# Altium PCB AirPi2_Power.PcbDoc
Units mm, origin at the board's own origin, x right, y up, seen from the top; angles counter-clockwise.
Board outline 80.9 x 56.52 mm, 2 copper layers (Top Layer, Bottom Layer); 40 components, 26 nets, 163 pads, 22 vias.
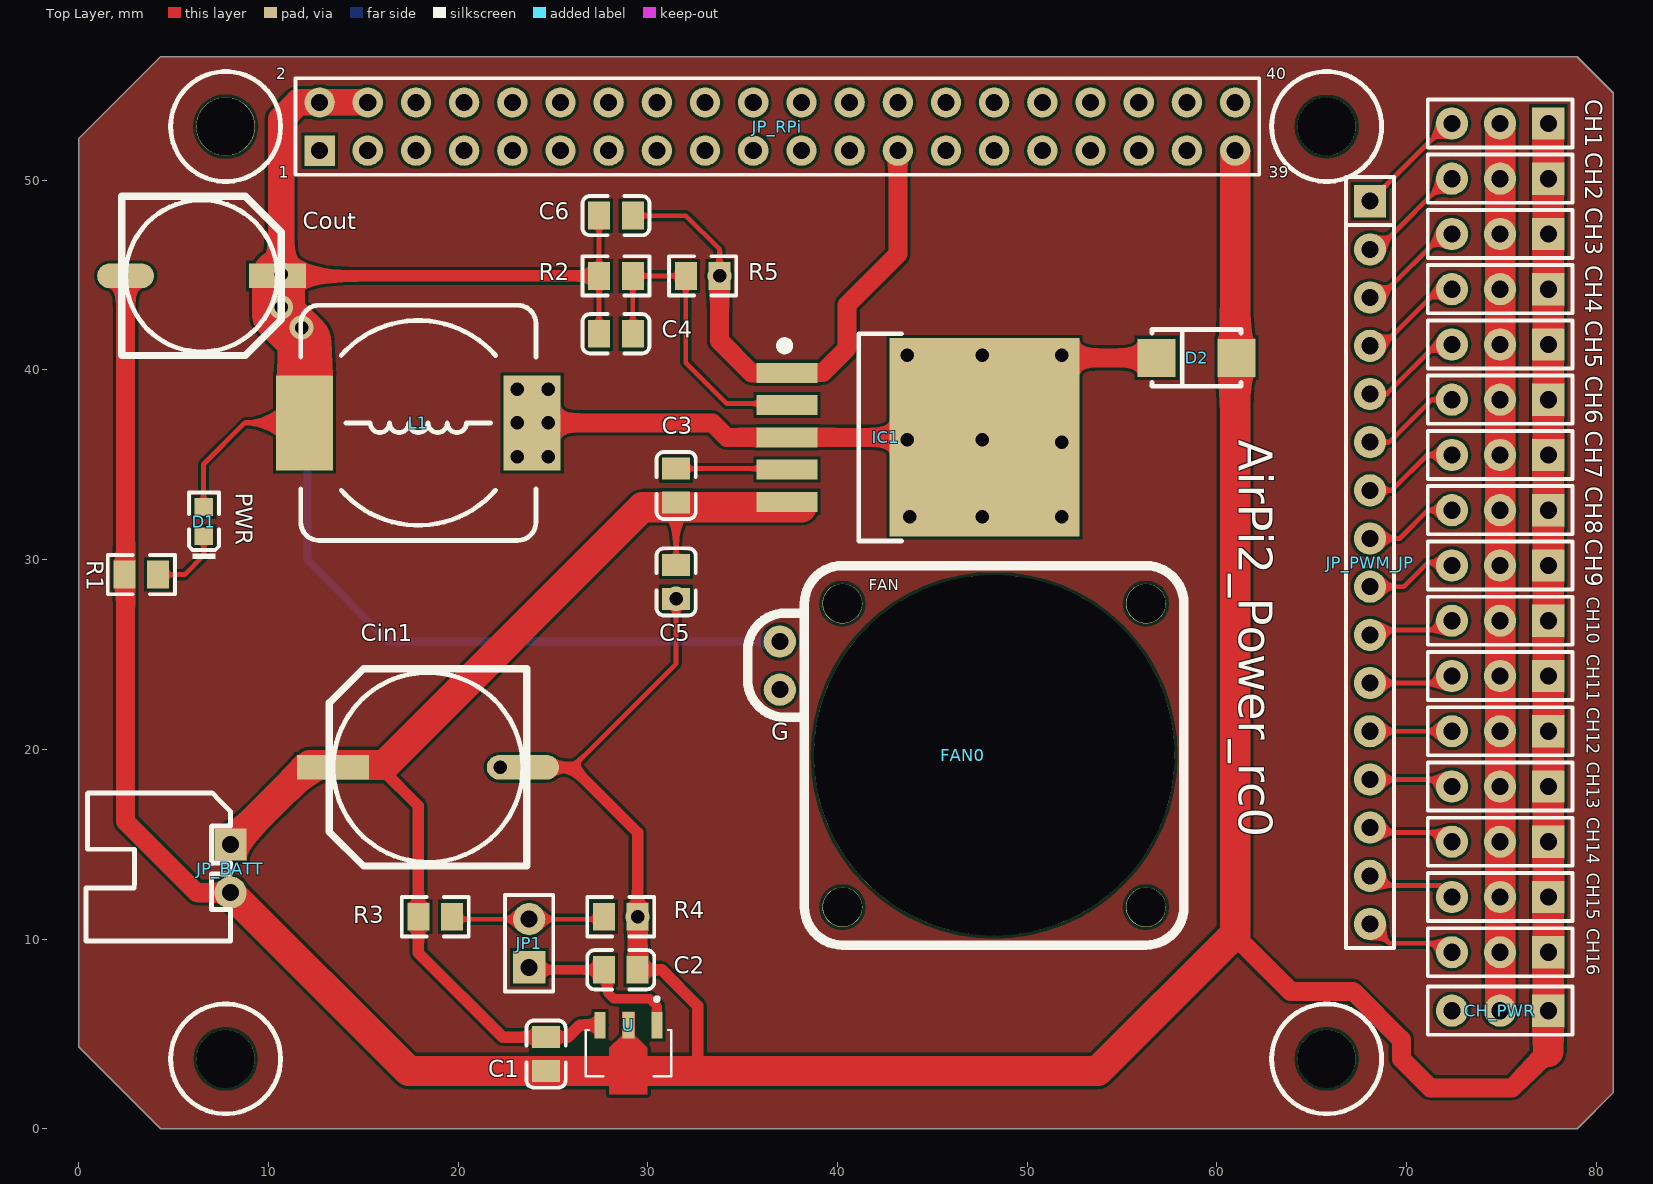
[diagram p0: Top Layer view]
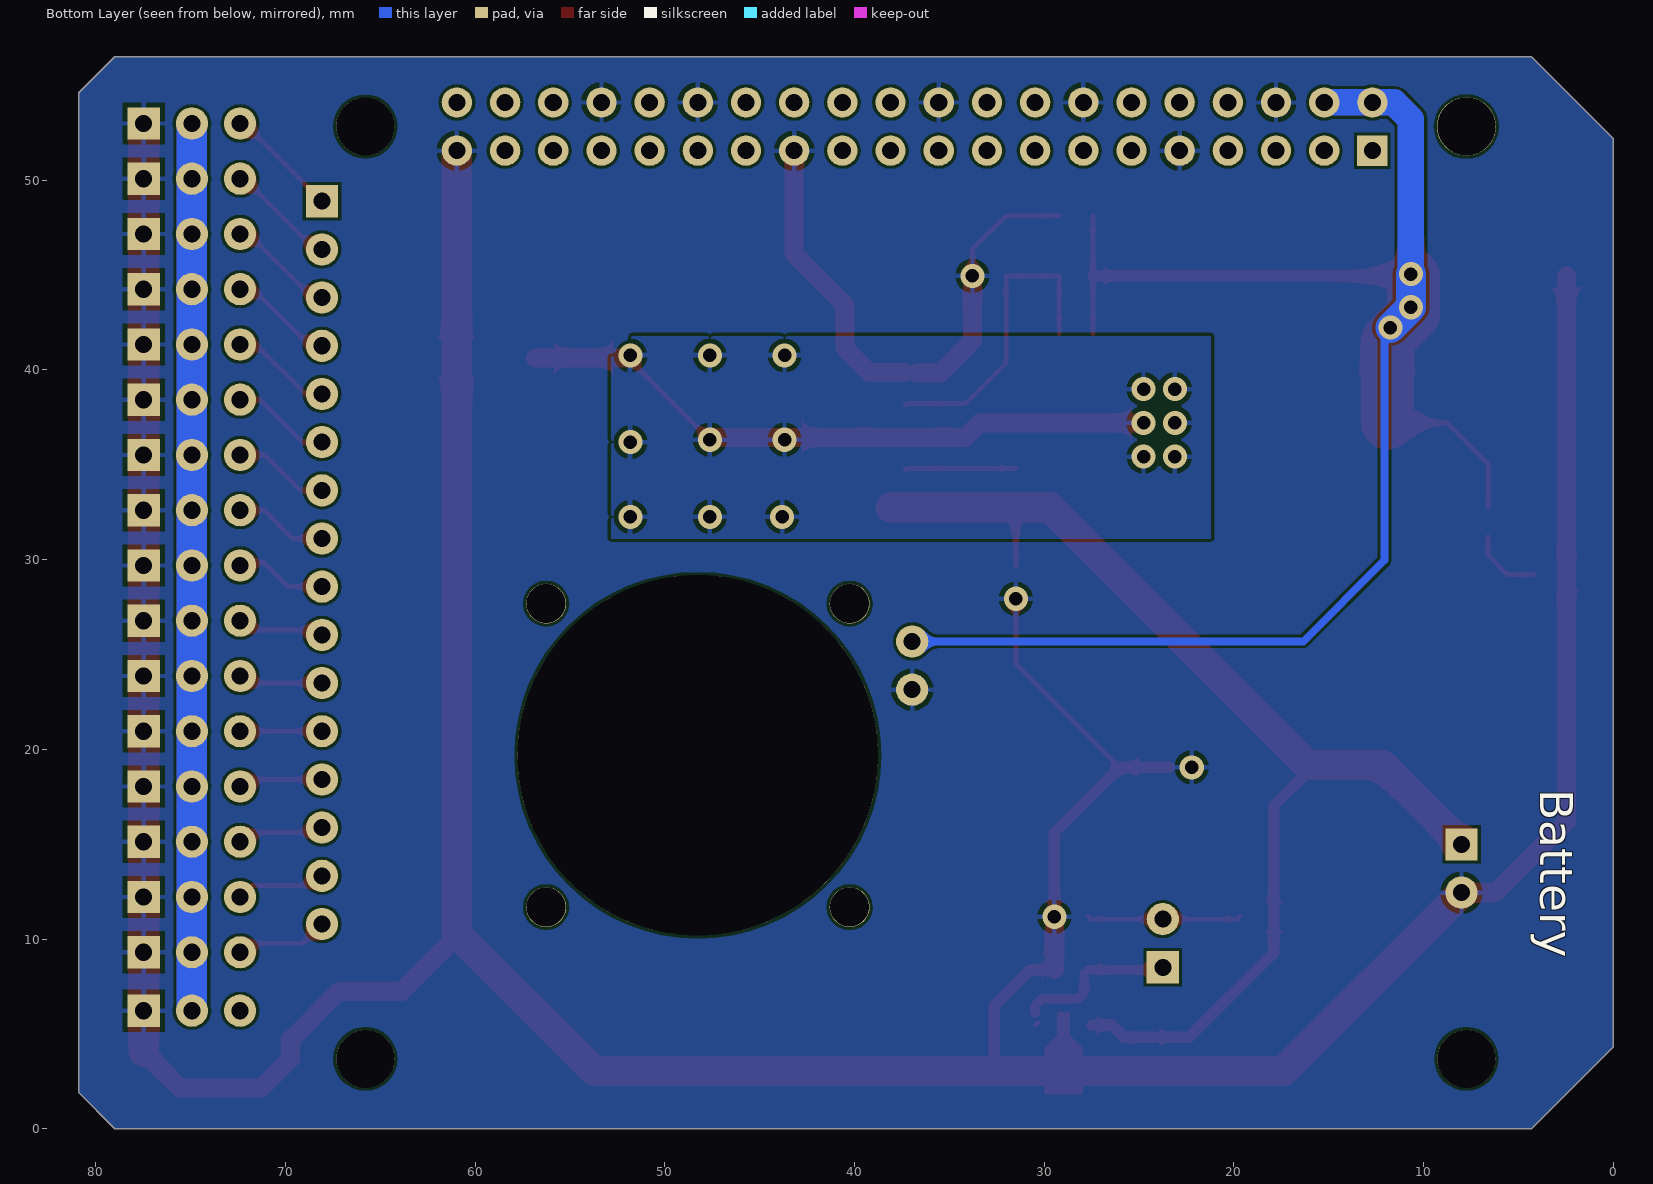
[diagram p1: Bottom Layer view, seen from below]

## Layer stack, top to bottom
Top Solder: solder mask 0.0102, Solder Resist, Dk 3.5
Top Layer: signal copper 0.0356
Dielectric 1: dielectric 0.32, FR-4, Dk 4.8
Bottom Layer: signal copper 0.0356
Bottom Solder: solder mask 0.0102, Solder Resist, Dk 3.5

## Board outline
0,52.197 4.318,56.515 78.994,56.515 80.899,54.61 80.899,1.905 78.994,0 4.318,0 0,4.318

## Design rules (kind name [scope] priority, off if disabled: settings)
Clearance [All] p1: gap=0.152 ignorepadtopadclearanceinfootprint=TRUE except(0: Arc-Hole Track-Hole SMDPad-Hole THPad-Hole Via-Hole Fill-Hole Poly-Hole Region-Hole Text-Hole)
DiffPairsRouting [All] p1: maxlimit=30 minlimit=0.152 mostfreqgap=0.254 toplayer_minwidth=0.152 toplayer_maxwidth=30 toplayer_prefwidth=0.254 bottomlayer_minwidth=0.152 bottomlayer_maxwidth=30 bottomlayer_prefwidth=0.254 maxuncoupledlength=12.7
PlaneConnect [All] p1: planeconnectstyle=Relief reliefexpansion=0.508 reliefentries=4 reliefconductorwidth=0.508 reliefairgap=0.254
PolygonConnect [All] p1: connectstyle=Relief reliefconductorwidth=0.254 reliefentries=4 polygonreliefangle="90 Angle" airgapwidth=0.254
RoutingTopology [All] p1: topology=Daisy_Simple
RoutingVias [All] p1: holewidth=0.711 width=1.27 viastyle="Through Hole" minholewidth=0.3 minwidth=0.6 maxholewidth=50 maxwidth=100
SolderMaskExpansion [All] p1: expansion=0.102
UnRoutedNet [All] p1: checkbadconnections=TRUE
Width [All] p1: maxlimit=30 minlimit=0.152 preferedwidth=0.254
26 further rules are at their usual default settings.

## Classes and differential pairs
net class PWM[15..0]: PWM0 PWM1 PWM2 PWM3 PWM4 PWM5 PWM6 PWM7 PWM8 PWM9 PWM10 PWM11 PWM12 PWM13 PWM14 PWM15
component class XL4015: C3 C4 C5 C6 Cin1 Cout D2 IC1 L1 R2 R5
component class Voltage_Divider: R3 R4
component class FAN: FAN0
component class AirPi2_Power: CH1 CH2 CH3 CH4 CH5 CH6 CH7 CH8 CH9 CH10 CH11 CH12 CH13 CH14 CH15 CH16 CH_PWR D1 JP1 JP_BATT JP_PWM_JP JP_RPi R1
component class 78l06: C1 C2 U

## Components (designator, comment, footprint, x,y, rotation, side; value= is the part's Value field where it differs from the comment)
C1 "330nF (334) 10% 50V" 0805_C 24.638,3.937 r90 top
C2 "100nF(104) 10% 50V" 0805_C 28.575,8.382 r180 top
C3 "1uF (105) 10% 50V" 0805_C 31.496,33.909 r270 top
C4 "33nF (333) 10% 50V" 0805_C 28.322,41.91 r180 top
C5 "1uF (105) 10% 50V" 0805_C 31.496,28.829 r90 top
C6 "1uF (105) 10% 50V" 0805_C 28.322,48.133 r180 top
CH1 "HDR-1X3" HDR2.54-LI-3P 74.93,52.993 r180 top
CH2 "HDR-1X3" HDR2.54-LI-3P 74.93,50.08 r180 top
CH3 "HDR-1X3" HDR2.54-LI-3P 74.93,47.168 r180 top
CH4 "HDR-1X3" HDR2.54-LI-3P 74.93,44.255 r180 top
CH5 "HDR-1X3" HDR2.54-LI-3P 74.93,41.343 r180 top
CH6 "HDR-1X3" HDR2.54-LI-3P 74.93,38.43 r180 top
CH7 "HDR-1X3" HDR2.54-LI-3P 74.93,35.518 r180 top
CH8 "HDR-1X3" HDR2.54-LI-3P 74.93,32.605 r180 top
CH9 "HDR-1X3" HDR2.54-LI-3P 74.93,29.693 r180 top
CH10 "HDR-1X3" HDR2.54-LI-3P 74.93,26.78 r180 top
CH11 "HDR-1X3" HDR2.54-LI-3P 74.93,23.868 r180 top
CH12 "HDR-1X3" HDR2.54-LI-3P 74.93,20.955 r180 top
CH13 "HDR-1X3" HDR2.54-LI-3P 74.93,18.042 r180 top
CH14 "HDR-1X3" HDR2.54-LI-3P 74.93,15.13 r180 top locked
CH15 "HDR-1X3" HDR2.54-LI-3P 74.93,12.217 r180 top
CH16 "HDR-1X3" HDR2.54-LI-3P 74.93,9.305 r180 top
CH_PWR "HDR-1X3" HDR2.54-LI-3P 74.93,6.223 r180 top
Cin1 "220uF/50V" "CM F(10*10.2)" 18.415,19.05 r180 top locked
Cout "470uF/16V" "CM E(8*10.2)" 6.477,44.958 r0 top locked
D1 "红灯 0603" 0603_LED_S1 6.604,32.004 r90 top
D2 "SS54" SMA(DO-214AC)_S1 58.928,40.64 r0 top
FAN0 "20mm_5V_风扇" 20mmFAN 40.26,11.685 r0 top locked
IC1 "XL4015" TO263-5A 37.338,36.449 r270 top locked
JP1 "HDR-1X2" HDR2.54-M-LI-2P 23.749,9.779 r90 top locked
JP_BATT "HDR-1X2" XH2.54-WI-2P 8.001,13.716 r270 top locked
JP_PWM_JP "HDR-1X16" HDR2.54-M-LI-16P 68.072,29.845 r270 top locked
JP_RPi "Header 2X11" HDR2.54-LI-2x20P 36.83,52.832 r0 top locked
L1 "47uH" CDRH127 17.907,37.211 r180 top locked
R1 "1KΩ (1001) ±1%" 0805_R 3.302,29.21 r0 top
R2 "10KΩ (1002) ±1%" 0805_R 28.322,44.958 r180 top
R3 "4.7KΩ (4701) ±1%" 0805_R 18.796,11.176 r180 top
R4 "1KΩ (1001) ±1%" 0805_R 28.575,11.176 r180 top
R5 "3.3KΩ (3301) ±1%" 0805_R 32.894,44.958 r180 top
U "L78L06ACUTR" VREG_L78L12ABUTR 28.98,3.986 r270 top

## Footprints (in the part's own frame and the unit in brackets; to place one, negate y for a bottom-side part, rotate by r counter-clockwise, add the part's x,y. Pads: shape width x height; smd on the part's side, far side on the other; paste and mask are expansions set on the pad)
20mmFAN [mm] "20mm_5V_风扇"
  round 1.7 hole 0.9: 6(-3.3,11.46) 7(-3.3,14)
  round 2.1 hole 2.05: 8(0,0) 9(0,16) 10(16,16) 11(16,0)
  round 19 hole 19: 12(8,8)
  silkscreen extent -5,-2 18,18
0603_LED_S1 [mm]
  rect 0.93x0.98 smd: A(0.77,0) K(-0.77,0)
  silkscreen extent -1.97,-0.79 1.54,0.79, body extent -0.8,-0.4 0.8,0.4, height 0.6
0805_C [mm]
  rect 1.16x1.47 smd: 1(-0.89,0) 2(0.89,0)
  silkscreen extent -1.77,-1.04 1.77,1.04, body extent -1,-0.62 1,0.63, height 0.77
0805_R [mm]
  rect 1.16x1.47 smd: 1(-0.89,0) 2(0.89,0)
  silkscreen extent -1.77,-1.04 1.77,1.03, body extent -1,-0.62 1,0.63, height 0.49
CDRH127 [mm] "12*12*8mm（长宽高）"
  rect 3x5 smd: 1(-6,0) 2(6,0)
  silkscreen extent -6.2,-6.2 6.2,6.2, body extent -6,-6 6,6, height 7.8
"CM E(8*10.2)" [mm] "贴片电解电容，直径8mm，高10.2mm"
  rect 3x1.3 smd: 1(4,0)
  oval 3x1.3 smd: 2(-4,0)
  silkscreen extent -4.2,-4.2 4.2,4.2, body extent -4.5,-4.15 4.5,4.15, height 10.2
"CM F(10*10.2)" [mm] "贴片电解电容，直径10mm，高10.2mm"
  rect 3.8x1.3 smd: 1(5,0)
  oval 3.8x1.3 smd: 2(-5,0)
  silkscreen extent -5.2,-5.2 5.2,5.2, body extent -5.8,-5.15 5.8,5.15, height 10.2
HDR2.54-LI-2x20P [mm] "双排排针，20x2脚"
  rect 1.6x1.6 hole 0.9: 1(-24.13,-1.27)
  round 1.6 hole 0.9: 2(-24.13,1.27) 3(-21.59,-1.27) 4(-21.59,1.27) 5(-19.05,-1.27) 6(-19.05,1.27) 7(-16.51,-1.27) 8(-16.51,1.27) 9(-13.97,-1.27) 10(-13.97,1.27) 11(-11.43,-1.27) 12(-11.43,1.27) 13(-8.89,-1.27) 14(-8.89,1.27) 15(-6.35,-1.27) 16(-6.35,1.27) 17(-3.81,-1.27) 18(-3.81,1.27) 19(-1.27,-1.27) 20(-1.27,1.27) 21(1.27,-1.27) 22(1.27,1.27) 23(3.81,-1.27) 24(3.81,1.27) 25(6.35,-1.27) 26(6.35,1.27) 27(8.89,-1.27) 28(8.89,1.27) 29(11.43,-1.27) 30(11.43,1.27) 31(13.97,-1.27) 32(13.97,1.27) 33(16.51,-1.27) 34(16.51,1.27) 35(19.05,-1.27) 36(19.05,1.27) 37(21.59,-1.27) 38(21.59,1.27) 39(24.13,-1.27) 40(24.13,1.27)
  silkscreen extent -25.4,-2.54 25.4,2.54, body extent -25.4,-2.54 25.4,2.54, height 8.5
HDR2.54-LI-3P [mm] "排针，3脚"
  rect 1.7x1.7 hole 0.9: 1(-2.54,0)
  round 1.7 hole 0.9: 2(0,0) 3(2.54,0)
  silkscreen extent -3.81,-1.27 3.81,1.27, body extent -3.81,-1.27 3.81,1.27, height 8.5
HDR2.54-M-LI-2P [mm] "排母，2脚"
  rect 1.7x1.7 hole 0.9: 1(-1.27,0)
  round 1.7 hole 0.9: 2(1.27,0)
  silkscreen extent -2.54,-1.27 2.54,1.27, body extent -2.54,-1.27 2.54,1.27, height 8.5
HDR2.54-M-LI-16P [mm] "排母，16脚"
  rect 1.7x1.7 hole 0.9: 1(-19.05,0)
  round 1.7 hole 0.9: 2(-16.51,0) 3(-13.97,0) 4(-11.43,0) 5(-8.89,0) 6(-6.35,0) 7(-3.81,0) 8(-1.27,0) 9(1.27,0) 10(3.81,0) 11(6.35,0) 12(8.89,0) 13(11.43,0) 14(13.97,0) 15(16.51,0) 16(19.05,0)
  silkscreen extent -20.32,-1.27 20.32,1.27, body extent -20.32,-1.27 20.32,1.27, height 8.5
SMA(DO-214AC)_S1 [mm]
  rect 2x2 smd: 1(2.1,0) 2(-2.1,0)
  silkscreen extent -2.35,-1.5 2.35,1.5
TO263-5A [mm] "263，5脚晶体管"
  rect 1.05x3.2 smd: 1(-3.4,0) 2(-1.7,0) 3(0,0) 4(1.7,0) 5(3.4,0)
  rect 10.45x10 smd: 3(0,10.414)
  silkscreen extent -5.46,-0.33 5.46,6.04, body extent -5,-0.01 5,13.32, height 4.5
VREG_L78L12ABUTR [mm]
  rect 1.4x0.57 smd: 1(-1.475,1.5) 3(-1.475,-1.5)
  rect 1.4x0.65 smd paste-2 mask+0: 2(-1.475,0)
  Top Layer region: 2.175,-1 -0.275,-1 -0.95,-0.325 -2.175,-0.325 -2.175,0.325 -0.95,0.325 -0.275,1 2.175,1
  silkscreen extent -2.95,-2.25 1.22,2.25
XH2.54-WI-2P [mm] "接插件，2P"
  rect 1.7x1.7 hole 0.9: 1(-1.27,0)
  round 1.7 hole 0.9: 2(1.27,0)
  silkscreen extent -3.99,-7.62 3.81,0, body extent -3.77,-7.35 3.77,0.35, height 5.73

## Part data
C1: library part "0805 330nF (334) 10% 50V", "贴片电容", Package=0805, SuppliersPartNumber=C1740, ComponentLink1Description=¹©Ó, ComponentLink1URL=http://www.szlcsc.com/product/details_2092.html, Supplier=LC
C2: library part "0805 100nF(104) 10% 50V", "贴片电容", Package=0805, SuppliersPartNumber=C49678, ComponentLink1Description=¹©Ó, ComponentLink1URL=http://www.szlcsc.com/product/details_50686.html, Supplier=LC
C3 C5 C6: library part "0805 1uF (105) 10% 50V", "贴片电容", Package=0805, SuppliersPartNumber=C28323, ComponentLink1Description=¹©Ó, ComponentLink1URL=http://www.szlcsc.com/product/details_29074.html, Supplier=LC
C4: library part "0805 33nF (333) 10% 50V", "贴片电容", Package=0805, SuppliersPartNumber=C1739, ComponentLink1Description=¹©Ó, ComponentLink1URL=http://www.szlcsc.com/product/details_2091.html, Supplier=LC
CH1 CH2 CH3 CH4 CH5 CH6 CH7 CH8 CH9 CH10 CH11 CH12 CH13 CH14 CH15 CH16 CH_PWR: library part "Header 3", "3P接插件", BOM名称=3, 学习资源=www.o
Cin1 Cout: library part C-CM, "贴片电解电容"
D1: library part "0603 红灯", "发光二极管", Package=0603, SuppliersPartNumber=C2286, ComponentLink1Description=¹©Ó, ComponentLink1URL=http://www.szlcsc.com/product/details_2659.html, Supplier=LC
D2: library part "SMA(DO-214AC) SS54", "二极管", Package=SMA(DO-214AC), SuppliersPartNumber=C22452, ComponentLink1Description=¹©Ó, ComponentLink1URL=http://www.szlcsc.com/product/details_23178.html, Supplier=LC
FAN0: library part 20mmFAN
IC1: "DC降压芯片", BOM名称=DC, 学习资源=www.o
JP1 JP_BATT: library part "Header 2", "2P接插件", BOM名称=2, 学习资源=www.o
JP_PWM_JP: library part "Header 16", "16P接插件", BOM名称=16, 学习资源=www.o
JP_RPi: library part "Header 20X2", "20*2P接插件"
L1: library part L-CDRH, "功率屏蔽电感"
R1 R4: library part "0805 1KΩ (1001) 1%", "贴片电阻", Package=0805, SuppliersPartNumber=C17513, ComponentLink1Description=¹©Ó, ComponentLink1URL=http://www.szlcsc.com/product/details_18201.html, Supplier=LC
R2: library part "0805 10KΩ (1002) 1%", "贴片电阻", Package=0805, SuppliersPartNumber=C17414, ComponentLink1Description=¹©Ó, ComponentLink1URL=http://www.szlcsc.com/product/details_18102.html, Supplier=LC
R3: library part "0805 4.7KΩ (4701) 1%", "贴片电阻", Package=0805, SuppliersPartNumber=C17673, ComponentLink1Description=¹©Ó, ComponentLink1URL=http://www.szlcsc.com/product/details_18361.html, Supplier=LC
R5: library part "0805 3.3KΩ (3301) 1%", "贴片电阻", Package=0805, SuppliersPartNumber=C26010, ComponentLink1Description=¹©Ó, ComponentLink1URL=http://www.szlcsc.com/product/details_26753.html, Supplier=LC
U: "Linear Voltage Regulator IC 1 Output 100mA SOT-89-3", Package="SOT-89-3 STMicroelectronics", Availability=Unavailable, DigiKey-Purchase-URL=https://snapeda.com/shop?store=DigiKey&id=1221968, MF=STMicroelectronics, MP=L78L06ACUTR, Price=None, SnapEDA_Link=https://www.snapeda.com/parts/L78L06ACUTR/STMicroelectronics/view-part/1221968/?ref=snap

## Free pads (board coordinates)
  round 3.1 hole 3.05: FH0(7.747,52.832)
  round 3.05 hole 3.05: FH1(65.786,52.832) FH2(65.786,3.683) FH3(7.747,3.683)

## Via types
v1: diameter 1.27, hole 0.711, Top Layer to Bottom Layer, 22 vias

## Nets (pads, with @x,y where several pads share a name; then routed paths per layer and width w, separated by ;. In a path a pad name is that pad's centre, name@x,y a point inside that pad or via, vN(x,y) a via of type N, cw(c..) or ccw(c..) an arc to the next point about the centre after c; other vN are vias at no path point)
5V: C4.2 C6.2 Cout.1 D1.A FAN0.7 JP_RPi.2 JP_RPi.4 L1.2 R2.2 | length 108.8
  Top Layer w0.254: D1.A 6.582,32.796 6.582,35.03 8.763,37.211 L1.2 ; C4.2 R2.2 C6.2
  Top Layer w0.6: v1(10.668,45.053) 10.572,45.053 Cout.1 10.541,44.958 R2.2
  Top Layer w1.4: Cout.1@10.572,45.053 10.668,45.149 10.668,53.213 11.557,54.102 JP_RPi.2 JP_RPi.4
  Top Layer w2.8: Cout.1@10.541,44.958 10.541,42.926 11.907,41.56 L1.2
  Bottom Layer w0.4: v1(11.747,42.227) 12.065,41.91 12.065,29.972 16.352,25.685 FAN0.7
  Bottom Layer w1.4: v1(10.668,45.053) 10.668,53.213 11.557,54.102 JP_RPi.2 JP_RPi.4
  Bottom Layer w1.6: v1(10.668,45.053) v1(10.668,43.307) v1(11.747,42.227)
GND: C1.1 C2.1 C5.1 C6.1 CH1.1 CH2.1 CH3.1 CH4.1 CH5.1 CH6.1 CH7.1 CH8.1 CH9.1 CH10.1 CH11.1 CH12.1 CH13.1 CH14.1 CH15.1 CH16.1 CH_PWR.1 Cin1.2 Cout.2 D2.1 FAN0.6 IC1.1 JP_BATT.2 JP_RPi.6 JP_RPi.9 JP_RPi.14 JP_RPi.20 JP_RPi.25 JP_RPi.30 JP_RPi.34 JP_RPi.39 R1.1 R4.1 R5.1 U.2 | length 269.6
  Top Layer w0.254: 26.035,19.05 31.496,24.511 v1(31.496,27.939) ; 28.955,3.047 28.956,3.048 ; C6.1 32.004,48.133 33.784,46.353 v1(33.784,44.958) ; IC1.1 IC1.1@37.367,39.878 ; JP_RPi.39 JP_RPi.39@61.028,51.494
  Top Layer w0.6: Cin1.2 26.035,19.05 29.465,15.62 v1(29.465,11.176) ; C2.1 30.734,8.382 32.639,6.477 32.639,3.175
  Top Layer w1: Cout.2 2.477,16.192 6.223,12.446 JP_BATT.2 ; C2.1 v1(29.465,11.176) ; v1(33.784,44.958) 33.784,41.527 35.462,39.849 IC1.1@36.703,39.849 ; IC1.1@37.367,39.878 39.243,39.878 40.513,41.148 40.513,43.434 43.18,46.101 JP_RPi.25 ; 60.833,10.482 60.96,10.482 60.96,10.287 60.96,10.16 63.881,7.239 67.183,7.239 69.723,4.699 69.723,3.683 71.247,2.159 75.565,2.159 77.47,4.064
  Top Layer w1.6: JP_BATT.2 17.4,3.047 C1.1 28.955,3.047 53.72,3.047 60.96,10.287 ; 60.96,10.482 60.96,40.386 JP_RPi.39 ; 77.47,4.064 CH_PWR.1 CH14.1 CH13.1 CH12.1 CH11.1 CH10.1 CH9.1 CH8.1 CH7.1 CH6.1 CH5.1 CH4.1 CH3.1 CH1.1
  other v1: 22.225,19.05
NetC1_2: C1.2 C3.2 C5.2 Cin1.1 IC1.5 JP_BATT.1 R3.2 U.3 | length 64.8
  Top Layer w0.254: C5.2 31.496,32.766 C3.2
  Top Layer w0.6: Cin1.1@14.478,18.923 16.002,18.923 17.907,17.018 17.907,12.319 ; 17.906,12.701 R3.2 17.906,9.272 22.351,4.827 C1.2 25.782,4.827 26.416,5.461 U.3
  Top Layer w1.6: JP_BATT.1 12.192,19.177 16.129,19.177 29.718,32.766 31.496,32.766 IC1.5@38.1,32.766
NetC2_2: C2.2 JP1.1 U.1 | length 8.8
  Top Layer w0.254: JP1.1 JP1.1@23.876,8.382 ; C2.2 C2.2@27.891,8.176 ; U.1@30.322,5.619 U.1
  Top Layer w0.5: JP1.1@23.876,8.382 C2.2 ; C2.2@27.891,8.176 27.891,7.161 28.194,6.858 30.099,6.858 30.48,6.477 U.1@30.48,6.096
NetC3_1: C3.1 IC1.4 | length 5.9
  Top Layer w0.254: C3.1 37.288,34.799 IC1.4
NetC4_1: C4.1 IC1.2 R2.1 R5.2 | length 16.7
  Top Layer w0.254: C4.1 R2.1 R5.2 32.004,40.386 34.163,38.227 37.26,38.227 IC1.2
NetCH1_2: CH1.2 CH2.2 CH3.2 CH4.2 CH5.2 CH6.2 CH7.2 CH8.2 CH9.2 CH10.2 CH11.2 CH12.2 CH13.2 CH14.2 CH15.2 CH16.2 CH_PWR.2 | length 93.5
  Top Layer w1.6: CH_PWR.2 CH12.2 CH10.2 CH9.2 CH8.2 CH7.2 CH6.2 CH5.2 CH4.2 CH3.2 CH2.2 CH1.2
  Bottom Layer w1.6: CH_PWR.2 CH14.2 CH11.2 CH10.2 CH9.2 CH8.2 CH7.2 CH6.2 CH5.2 CH4.2 CH3.2 CH2.2 CH1.2
NetD1_K: D1.K R1.2 | length 3.8
  Top Layer w0.254: R1.2 5.588,29.21 6.604,30.226 D1.K
NetD2_2: D2.2 IC1.3 L1.1 | length 34
  Top Layer w0.254: IC1.3@47.752,36.449 IC1.3@51.943,40.64
  Top Layer w1: v1(24.765,37.211) 33.401,37.211 34.163,36.449 IC1.3@47.625,36.449 ; IC1.3@51.943,40.64 D2.2
  other v1: 43.815,32.258 47.625,32.258 51.816,32.258 23.114,35.433 24.765,35.433 51.816,36.195 43.688,36.322 47.625,36.322 23.114,37.211 23.114,38.989 24.765,38.989 43.688,40.767 47.625,40.767 51.816,40.767
NetJP1_2: JP1.2 R3.1 R4.2 | length 8.1
  Top Layer w0.254: R3.1 19.813,11.049 JP1.2 27.558,11.049 R4.2
PWM0: CH1.3 JP_PWM_JP.1 | length 6
  Top Layer w0.254: JP_PWM_JP.1 72.17,52.993 CH1.3
PWM1: CH2.3 JP_PWM_JP.2 | length 5.9
  Top Layer w0.254: JP_PWM_JP.2 68.349,46.632 68.73,46.632 72.178,50.08 CH2.3
PWM2: CH3.3 JP_PWM_JP.3 | length 5.7
  Top Layer w0.254: JP_PWM_JP.3 68.189,43.932 68.697,43.932 71.933,47.168 CH3.3
PWM3: CH4.3 JP_PWM_JP.4 | length 5.6
  Top Layer w0.254: JP_PWM_JP.4 68.707,41.275 71.687,44.255 CH4.3
PWM4: CH5.3 JP_PWM_JP.5 | length 5.4
  Top Layer w0.254: JP_PWM_JP.5 68.961,38.735 71.569,41.343 CH5.3
PWM5: CH6.3 JP_PWM_JP.6 | length 5.2
  Top Layer w0.254: JP_PWM_JP.6 69.088,36.195 71.323,38.43 CH6.3
PWM6: CH7.3 JP_PWM_JP.7 | length 5.1
  Top Layer w0.254: JP_PWM_JP.7 69.215,33.655 71.078,35.518 CH7.3
PWM7: CH8.3 JP_PWM_JP.8 | length 4.9
  Top Layer w0.254: JP_PWM_JP.8 69.63,31.115 71.12,32.605 CH8.3
PWM8: CH9.3 JP_PWM_JP.9 | length 4.9
  Top Layer w0.254: JP_PWM_JP.9 69.85,28.575 71.12,29.845 72.238,29.845 CH9.3
PWM9: CH10.3 JP_PWM_JP.10 | length 4.6
  Top Layer w0.254: JP_PWM_JP.10 68.326,26.289 71.859,26.289 72.35,26.78 CH10.3
PWM10: CH11.3 JP_PWM_JP.11 | length 4.5
  Top Layer w0.254: JP_PWM_JP.11 71.626,23.495 71.999,23.868 CH11.3
PWM11: CH12.3 JP_PWM_JP.12 | length 4.3
  Top Layer w0.254: JP_PWM_JP.12 CH12.3
PWM12: CH13.3 JP_PWM_JP.13 | length 4.5
  Top Layer w0.254: JP_PWM_JP.13 71.626,18.415 71.999,18.042 CH13.3
PWM13: CH14.3 JP_PWM_JP.14 | length 4.6
  Top Layer w0.254: JP_PWM_JP.14 68.326,15.621 71.859,15.621 72.35,15.13 CH14.3
PWM14: CH15.3 JP_PWM_JP.15 | length 4.8
  Top Layer w0.254: JP_PWM_JP.15 68.58,12.827 71.78,12.827 CH15.3
PWM15: CH16.3 JP_PWM_JP.16 | length 4.9
  Top Layer w0.254: JP_PWM_JP.16 69.088,9.779 71.916,9.779 CH16.3
pads on no net: CH_PWR.3 FAN0.8 FAN0.9 FAN0.10 FAN0.11 FAN0.12 JP_RPi.1 JP_RPi.3 JP_RPi.5 JP_RPi.7 JP_RPi.8 JP_RPi.10 JP_RPi.11 JP_RPi.12 JP_RPi.13 JP_RPi.15 JP_RPi.16 JP_RPi.17 JP_RPi.18 JP_RPi.19 JP_RPi.21 JP_RPi.22 JP_RPi.23 JP_RPi.24 JP_RPi.26 JP_RPi.27 JP_RPi.28 JP_RPi.29 JP_RPi.31 JP_RPi.32 JP_RPi.33 JP_RPi.35 JP_RPi.36 JP_RPi.37 JP_RPi.38 JP_RPi.40

## Polygon pours and split planes (outlines as drawn)
GND on Bottom Layer "Bottom GND" (solid, pour order 12): 0,52.197 4.318,56.515 78.994,56.515 80.899,54.61 80.899,1.905 78.994,0 4.318,0 0,4.318
NetD2_2 on Bottom Layer "Bottom Layer-NetD2_2" (solid, pour order 2): 52.832,41.783 52.832,31.115 21.209,31.115 21.209,41.783
no net on Top Layer "Top GND" (solid, pour order 13): 0,52.197 4.318,56.515 78.994,56.515 80.899,54.61 80.899,1.905 78.994,0 4.318,0 0,4.318

## Silkscreen, mask and mechanical layers (free items; w line width, h text height)
Top Overlay:
  circle w0.254: c65.786,52.832 r2.899
  circle w0.254: c7.747,52.832 r2.899
  circle w0.254: c7.747,3.683 r2.899
  circle w0.254: c65.786,3.683 r2.899
  text "AirPi2_Power_rc0" at 60.579,36.322 h3.05 r270
  text "PWR" at 8.001,33.528 h1.52 r270
Bottom Overlay:
  text "Battery" at 4.445,17.907 h3 r90
Mechanical 1:
  lines w0.254: 0.127,5.715 ccw(c3.302,5.715) 1.057,3.47 3.47,1.057 ccw(c5.715,3.302) 5.715,0.127 77.597,0.127 ccw(c77.597,3.302) 80.772,3.302 80.772,53.213 ccw(c77.597,53.213) 77.597,56.388 5.715,56.388 ccw(c5.715,53.213) 3.47,55.458 1.057,53.045 ccw(c3.302,50.8) 0.127,50.8 0.127,5.715
Mechanical 13:
  lines w0.254: 0.127,5.715 ccw(c3.302,5.715) 1.057,3.47 3.47,1.057 ccw(c5.715,3.302) 5.715,0.127 77.597,0.127 ccw(c77.597,3.302) 80.772,3.302 80.772,53.213 ccw(c77.597,53.213) 77.597,56.388 5.715,56.388 ccw(c5.715,53.213) 3.47,55.458 1.057,53.045 ccw(c3.302,50.8) 0.127,50.8 0.127,5.715

## Text inside footprints (layer, text, board x,y; h text height)
FAN0: Top Overlay "FAN" at 41.66,28.185 h1; Top Overlay "G" at 36.51,20.185 h1.52
JP_RPi: Top Overlay "39" at 62.738,49.911 h1.02; Top Overlay "40" at 62.611,55.118 h1.02; Top Overlay "2" at 10.414,55.118 h1.02; Top Overlay "1" at 10.541,49.911 h1.02